# Altium PCB PCB1.PcbDoc (part 4 of 7)
Units mm, origin at the board's own origin, x right, y up, seen from the top; angles counter-clockwise.
Board outline 100 x 100 mm, 6 copper layers (Top, GND_1, Signal, PWR, GND_2, Bottom), stack 0.816 mm thick; 321 components, 260 nets, 1718 pads, 694 vias.
Unrouted connection lines stored in the file: 527.
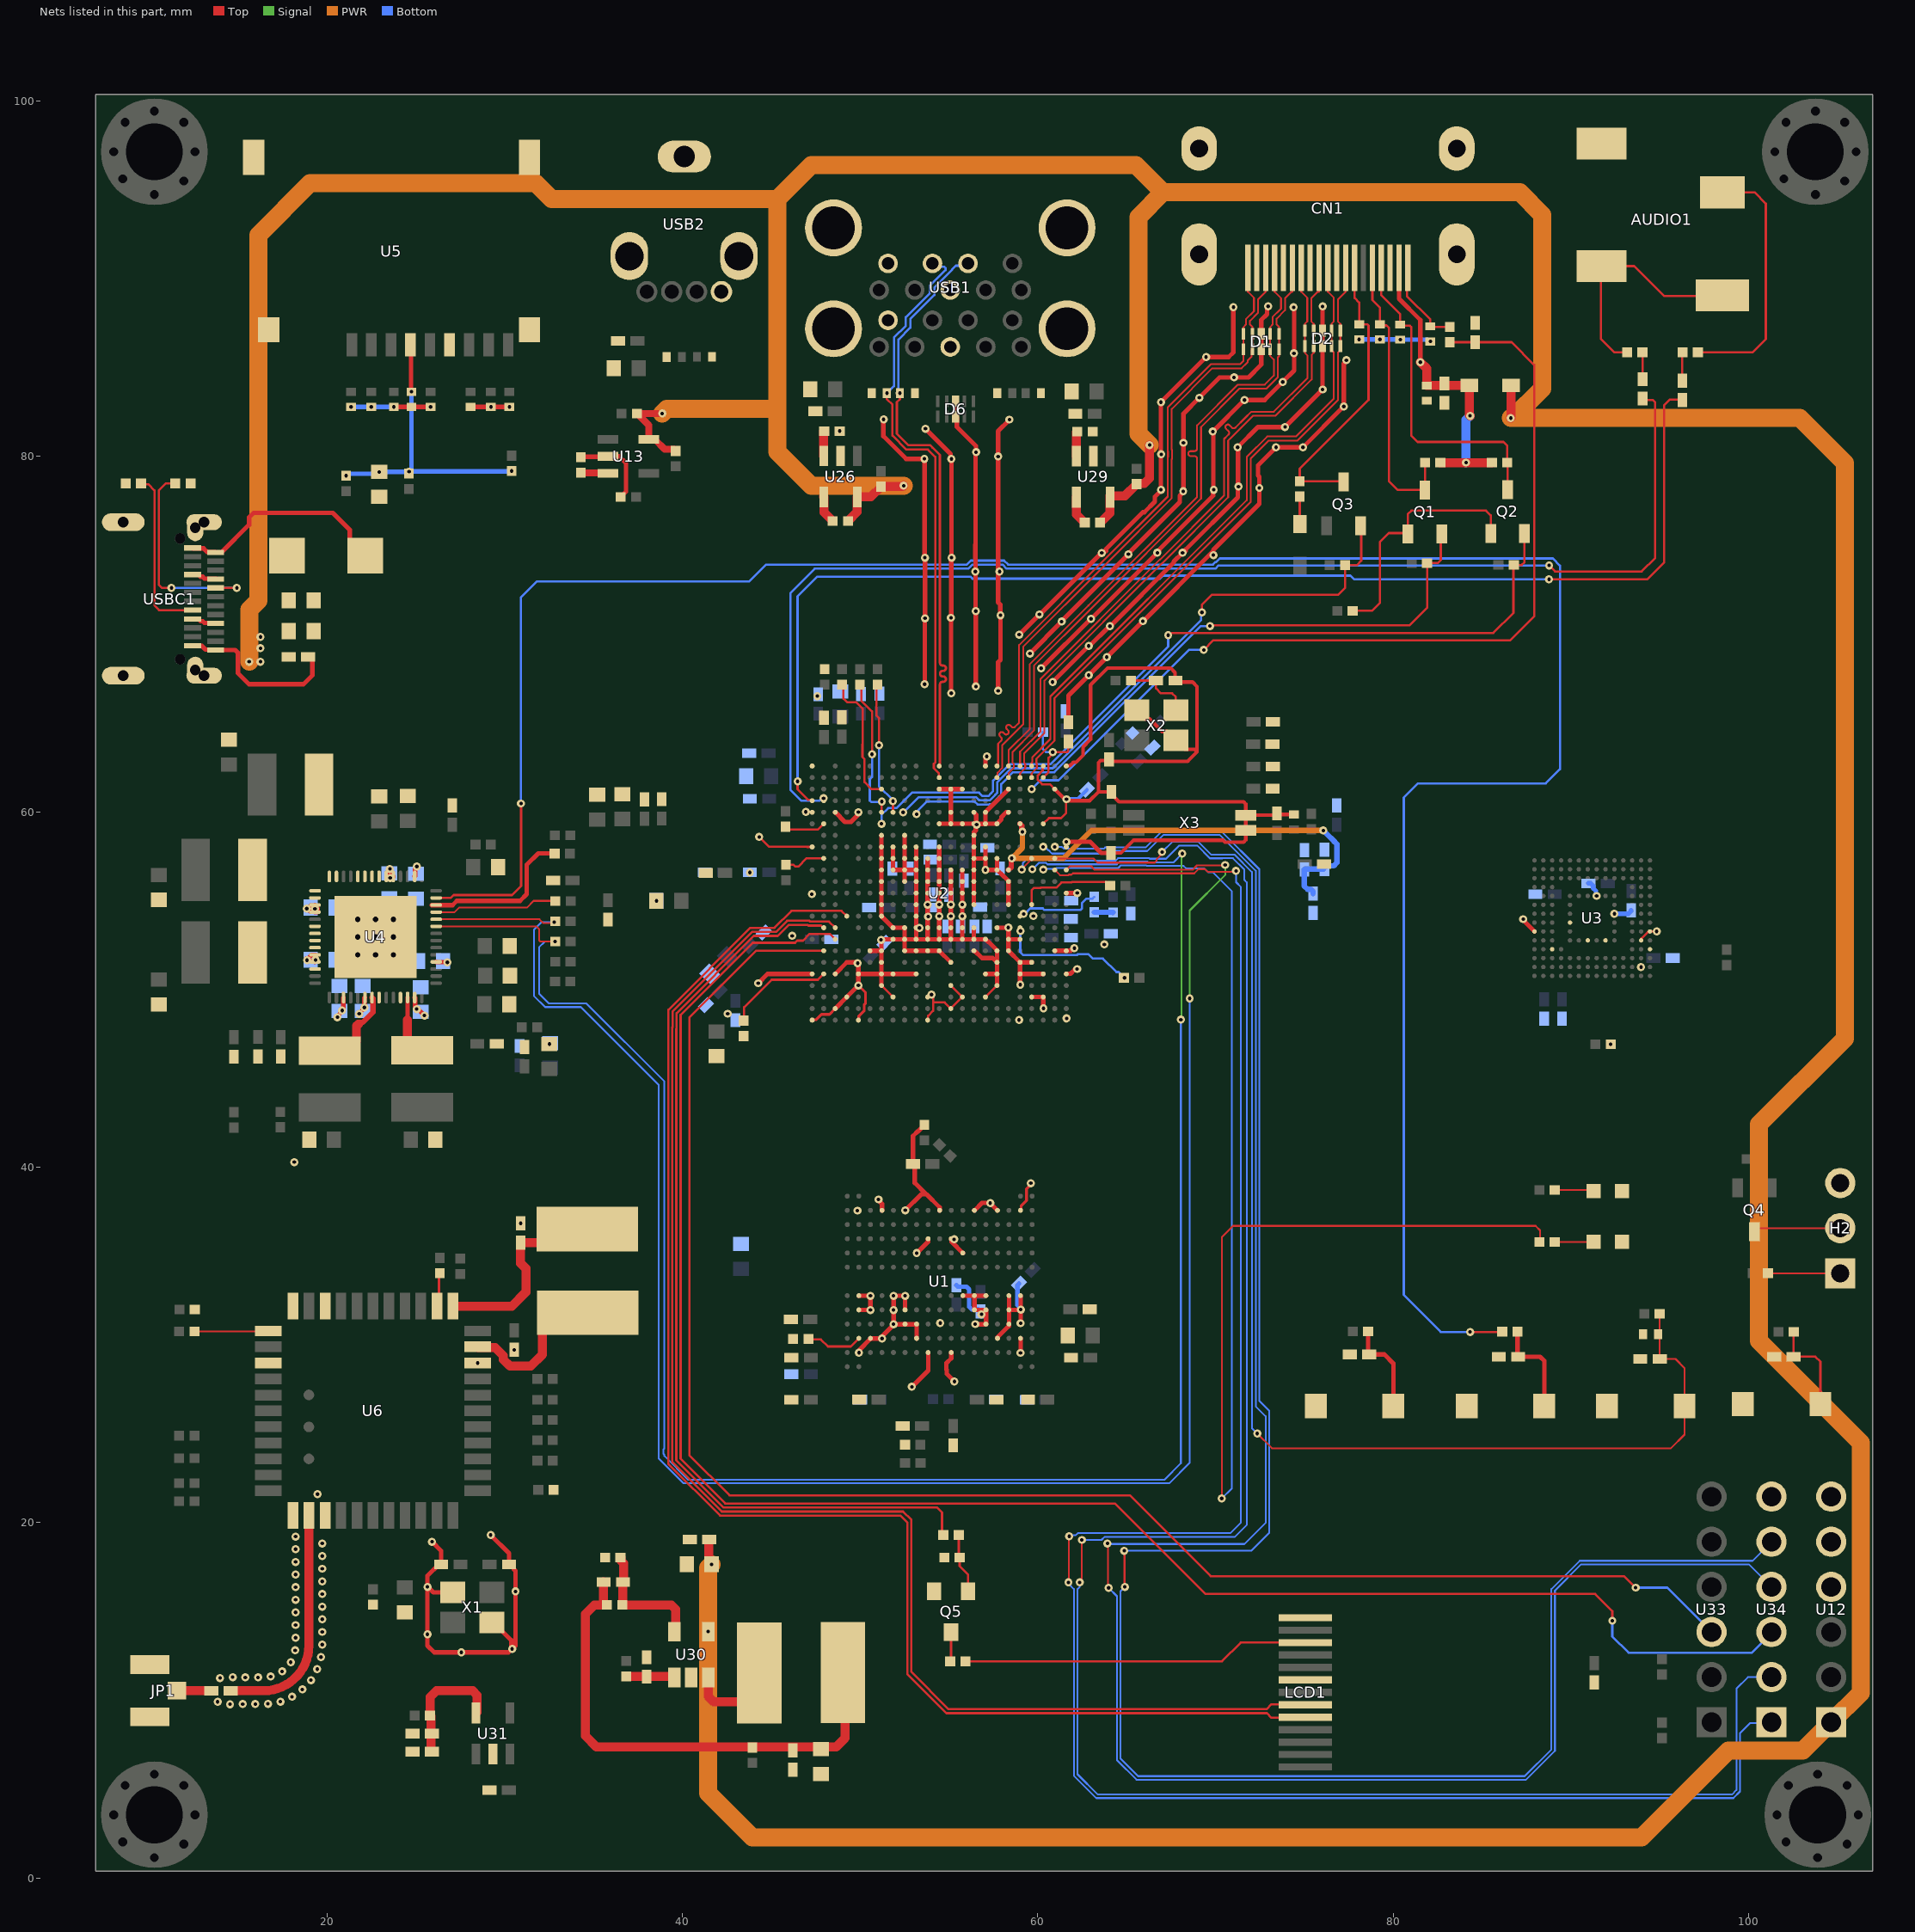
[diagram p7: the nets of this part, all layers, seen from the top]

## Via types
v1: diameter 0.457, hole 0.203, Top to Bottom, tented both sides, 685 vias
v2: diameter 0.61, hole 0.305, Top to Bottom, tented both sides, 9 vias

## Nets (pads, with @x,y where several pads share a name; then routed paths per layer and width w, separated by ;. In a path a pad name is that pad's centre, name@x,y a point inside that pad or via, vN(x,y) a via of type N, cw(c..) or ccw(c..) an arc to the next point about the centre after c; other vN are vias at no path point) (continued)
GND: AUDIO1.1 C1.1 C2.1 C3.1 C4.1 C5.1 C6.1 C7.1 C8.1 C9.1 C10.1 C11.1 C12.1 C13.1 C14.1 C15.1 C16.1 C17.1 C18.1 C19.1 C20.1 C21.1 C22.1 C23.1 C24.1 C25.1 C26.1 C27.1 C28.1 C29.1 C30.1 C31.1 C32.1 C35.1 C36.1 C38.1 C39.2 C40.1 C41.2 C42.1 C43.1 C46.1 C47.1 C48.1 C49.1 C50.1 C51.1 C52.1 C53.1 C54.1 C55.1 C56.1 C57.1 C58.1 C59.1 C60.1 C61.1 C62.1 C63.1 C64.1 C65.1 C66.1 C67.1 C68.1 C69.1 C70.1 C71.1 C72.1 C73.1 C74.1 C75.1 C76.1 C77.1 C78.1 C79.1 C80.1 C81.2 C82.2 C83.1 C84.1 C85.1 C86.1 C87.1 C89.1 C90.1 C91.1 C92.1 C93.1 C94.1 C95.1 C96.1 C97.1 C98.1 C99.1 C100.1 C101.2 C102.1 C103.1 C104.1 C105.1 C106.1 C107.1 C108.1 C109.1 C110.1 C111.1 C112.1 C113.1 C114.1 C115.1 C116.1 C117.1 C118.1 C119.1 C120.1 C121.1 C122.1 C123.1 C124.1 C125.2 C126.1 C127.1 C128.1 C129.1 C130.1 C131.1 C132.1 C133.1 C134.1 C135.1 C136.1 C137.1 C138.1 C139.2 C140.2 C141.1 C142.1 C143.1 C144.1 C145.1 C146.1 C147.1 C148.1 C149.1 C150.1 C151.1 C152.1 C153.1 C154.1 C155.1 C156.1 C157.1 CN1.2 CN1.5 CN1.8 CN1.11 CN1.17 CN1.20 CN1.21 CN1.22 CN1.23 D1.3 D1.8 D2.3 D2.8 D5.2 D6.3 D6.8 H2.3 JP1.2 JP1.3 LCD1.8 LCD1.13 PWR.1 Q5.2 R1.1 R2.1 R6.1 R7.1 R22.1 R31.1 R32.1 R38.1 R40.1 R41.2 R55.2 R57.1 R60.2 R63.2 R65.2 R72.2 R73.2 R76.1 R94.2 STATUS.1 SW1.1 SW2.1 SW3.1 SW4.1 U1.B2 U1.B5 U1.B6 U1.B12 U1.C3 U1.C5 U1.C6 U1.D3 U1.D12 U1.E4 U1.E5 U1.E6 U1.F4 U1.F5 U1.F6 U1.F12 U1.G3 U1.G4 U1.G9 U1.H2 U1.H10 U1.J4 U1.J12 U1.K2 U1.K10 U1.L6 U1.L9 U1.M4 U1.M5 U1.M6 U1.M12 U1.N4 U1.N5 U1.N6 U1.P3 U1.P12 U1.R4 U1.R5 U1.R6 U1.T2 U1.T3 U1.T4 U1.T5 U1.T6 U1.T12 U2.A1 U2.A16 U2.A21 U2.A23 U2.AA4 U2.AA8 U2.AA11 U2.AA14 U2.AA16 U2.AA20 U2.AA21 U2.AB3 U2.AB13 U2.AB21 U2.AC1 U2.AC5 U2.AC11 U2.AC19 U2.AC23 U2.C12 U2.C13 U2.C14 U2.C18 U2.C22 U2.D23 U2.E1 U2.E3 U2.E5 U2.E13 U2.E15 U2.E16 U2.E18 U2.F12 U2.F13 U2.F14 U2.F15 U2.F16 U2.F17 U2.F21 U2.G7 U2.G9 U2.G15 U2.H1 U2.H7 U2.H8 U2.H9 U2.H10 U2.H12 U2.H15 U2.H16 U2.H23 U2.J7 U2.J8 U2.J9 U2.J10 U2.J11 U2.J12 U2.J15 U2.J16 U2.J17 U2.K7 U2.K8 U2.K9 U2.K10 U2.K11 U2.K12 U2.K13 U2.K14 U2.K15 U2.K16 U2.K17 U2.L7 U2.L9 U2.L10 U2.L11 U2.L12 U2.L13 U2.L14 U2.L15 U2.L18 U2.M1 U2.M7 U2.M10 U2.M11 U2.M12 U2.M13 U2.M14 U2.M15 U2.M18 U2.M23 U2.N7 U2.N10 U2.N11 U2.N12 U2.N13 U2.N14 U2.N15 U2.N18 U2.P7 U2.P10 U2.P11 U2.P12 U2.P13 U2.P14 U2.P20 U2.R8 U2.R9 U2.R10 U2.R11 U2.R12 U2.R13 U2.R14 U2.R15 U2.R17 U2.R18 U2.T7 U2.T8 U2.T9 U2.T10 U2.T11 U2.T12 U2.T13 U2.T14 U2.T15 U2.T16 U2.T18 U2.T19 U2.U6 U2.U7 U2.U9 U2.U10 U2.U11 U2.U12 U2.U15 U2.U17 U2.U18 U2.U22 U2.U23 U2.V5 U2.V7 U2.V13 U2.V17 U2.V19 U2.V20 U2.W1 U2.W3 U2.W5 U2.W7 U2.W8 U2.W10 U2.W16 U2.W17 U2.W19 U2.W21 U2.W23 U2.Y5 U2.Y7 U2.Y13 U2.Y17 U2.Y19 U3.A6 U3.C4 U3.E7 U3.G5 U3.H10 U3.J5 U3.K8 U3.N2 U3.N5 U3.P4 U3.P6 U4.8 U4.11 U4.37 U4.38 U4.41 U4.42 U4.48 U4.49 U4.54 U4.57 U5.6 U5.10 U5.11 U5.12 U5.13 U6.1 U6.3 U6.20 U6.31 U6.33 U6.36 U7.1 U8.1 U9.1 U10.1 U11.1 U12.4 U12.5 U12.6 U13.2 U14.1 U15.1 U16.1 U17.1 U18.1 U19.1 U20.1 U21.1 U22.1 U23.1 U24.1 U25.1 U26.2 U27.1 U28.1 U29.2 U30.2 U31.2 U32.1 U34.6 U35.1 USB1.4 USB1.7 USB1.13 USB1.16 USB1.19 USB1.20 USB1.21 USB1.22 USB2.4 USB2.5 USB2.6 USB2.7 USBC1.1 USBC1.2 USBC1.3 USBC1.4 USBC1.A1 USBC1.A12 USBC1.B1 USBC1.B12 X1.2 X1.4 X2.2 X2.4 X3.2 X3.3 | length 477
  Top w0.127: v1(44.322,58.59) 44.875,58.037 47.011,58.037 47.016,58.032 U2.H1@47.303,58.032 ; v1(46.946,60.005) 46.958,59.994 47.291,59.994 U2.E1@47.303,59.982 ; U2.Y7@51.203,50.232 U2.AA8@51.853,49.582 ; U2.AC11@53.803,48.282 53.832,48.311 53.832,48.532 54.107,48.806 54.107,49.278 ; U2.AA11@53.803,49.582 53.843,49.582 53.98,49.719 v1(54.02,49.719) ; v1@53.982,49.719 53.982,49.667 54.107,49.543 54.107,49.278 ; U2.Y13@55.103,50.232 U2.AA14@55.753,49.582 55.103,48.932 54.756,49.278 54.107,49.278 ; U2.AA16@57.053,49.582 U2.Y17@57.703,50.232 ; U2.F21@60.303,59.332 60.624,59.653 61.304,59.653 61.595,59.944 61.595,60.624 U2.D23@61.603,60.632 ; U2.A21@60.303,62.582 60.274,62.553 60.274,62.332 59.999,62.058 59.999,61.806 60.247,61.559 60.676,61.559 U2.C22@60.953,61.282 ; U2.H23@61.603,58.032 61.606,58.035 61.606,58.314 v1(61.609,58.317) ; U3.N5@93.95,52.771 93.973,52.794 93.973,52.886 94.334,53.247 94.426,53.247 U3.P6@94.45,53.271 v1(94.825,53.271) v1@94.835,53.261
  Top w0.152: U2.AC1@47.303,48.282 47.327,48.306 47.53,48.306 47.831,48.607 48.278,48.607 U2.AB3@48.603,48.932 ; U2.AC5@49.903,48.282 49.927,48.306 49.927,48.509 50.237,48.818 50.237,49.165 50.308,49.235 50.308,49.827 v1(49.903,50.232) ; U1.T12@59.032,37.567 59.056,37.591 59.056,37.816 59.362,38.122 59.362,38.78 59.606,39.024 v1(59.606,39.107)
  Top w0.203: U2.C22@60.953,61.282 U2.D23@61.603,60.632 ; U2.A23@61.603,62.582 61.618,62.597 61.805,62.597 62.005,62.797 62.15,62.797 62.543,63.19 62.543,63.654 62.965,64.077 62.965,67.138 63.92,68.092 67.474,68.092 67.724,67.843 67.724,67.408 67.822,67.31 68.707,67.31 68.961,67.056 68.961,63.373 ; v1(61.612,60.714) 61.603,60.705 U2.D23@61.603,60.632 ; C140.2@64.124,57.692 64.677,57.692 65.385,58.4 70.43,58.4 70.536,58.293 71.58,58.293 71.699,58.412 X3.3@71.699,59.817 ; X2.4@65.567,65.726 66.065,65.228 66.292,65.228 66.995,64.525 67.269,64.525 X2.2@67.767,64.026 68.265,63.528 68.806,63.528 68.961,63.373 ; U32.1@74.422,59.861 73.505,59.861 C103.1@73.453,59.913 73.357,59.817 X3.3@71.699,59.817 ; U2.D23@61.603,60.632 62.918,60.632 63.41,61.124 ; 63.41,61.124 63.41,62.775 63.529,62.894 63.947,62.894 C128.1@64.008,62.955 64.117,62.846 68.434,62.846 68.961,63.373 ; 63.41,61.124 C139.2@64.135,61.124 64.135,60.999 64.566,60.568 71.58,60.568 71.699,60.449 X3.3@71.699,59.817
  Top w0.254: USBC1.B1@12.434,69.358 12.457,69.335 12.961,69.335 13.165,69.131 13.711,69.131 USBC1.A12@13.734,69.108 14.837,69.108 14.986,68.959 14.986,67.818 15.621,67.183 18.669,67.183 19.177,67.691 19.177,68.573 19.034,68.716 C54.1@18.941,68.716 ; USBC1.B12@12.434,74.858 12.457,74.835 13.049,74.835 13.253,74.631 13.711,74.631 USBC1.A1@13.734,74.608 14.059,74.608 15.621,76.17 15.621,76.581 15.875,76.835 20.32,76.835 21.277,75.878 21.277,75.293 D5.2@22.15,74.42 ; v1(23.762,82.797) U23.1@24.755,82.797 v1(25.826,82.797) ; v1(25.908,18.923) 26.425,18.406 C42.1@26.425,17.653 26.3,17.653 25.654,17.007 v1(25.654,16.383) ; X1.4@27.072,16.079 25.991,16.079 25.687,16.383 v1(25.654,16.383) ; U16.1@28.08,82.797 v1(29.223,82.797) v1(30.263,82.797) ; v1(29.21,19.304) 30.241,18.273 C41.2@30.241,17.642 30.366,17.642 30.509,17.499 30.509,17.374 30.607,17.276 v1(30.607,16.129) 30.607,13.081 v1(30.416,12.89) ; X1.2@29.272,14.379 29.372,14.379 30.378,13.373 30.378,12.929 v1(30.416,12.89) ; R55.2@34.287,79.958 34.313,79.984 35.778,79.984 U13.2@35.803,80.01 36.449,80.01 36.83,79.629 36.83,78.03 36.68,77.88 36.68,77.867 36.537,77.724 R57.1@36.524,77.724 ; v1(44.271,50.36) 44.271,50.362 44.791,50.882 U2.W1@47.303,50.882 ; U2.AB3@48.603,48.932 U2.AA4@49.253,49.582 v1(49.903,50.232) U2.V5@49.903,51.532 ; U2.W3@48.603,50.882 49.253,51.532 U2.V5@49.903,51.532 ; U2.E3@48.603,59.982 49.149,59.436 49.488,59.436 49.898,59.846 49.898,59.977 v1(49.903,59.982) ; v1(49.864,51.481) 49.903,51.52 U2.V5@49.903,51.532 ; U2.W5@49.903,50.882 U2.W7@51.203,50.882 ; v1(49.934,29.566) 49.939,29.57 49.939,29.702 U1.C3@50.579,30.343 ; U1.B5@49.934,31.966 v1(50.584,31.966) v1(50.584,32.766) U1.B6@49.934,32.766 ; U1.C3@50.584,30.366 v1(51.234,30.366) 51.239,30.371 51.239,30.494 51.877,31.132 51.877,31.161 v1(51.882,31.166) ; U2.U6@50.62,52.167 50.606,52.182 U2.U6@50.553,52.182 U2.U7@51.203,52.182 ; v1(51.035,38.188) 51.035,38.133 51.229,37.939 51.229,37.571 U1.D12@51.234,37.567 ; v1(51.18,52.797) U2.T7@51.228,52.749 ; U2.Y7@51.203,50.232 U2.W7@51.203,50.882 ; U2.T7@51.203,52.82 51.208,52.82 51.208,52.825 51.215,52.832 U2.T9@52.503,52.832 ; U2.T7@51.203,52.832 U2.U7@51.203,52.182 ; U2.G7@51.203,58.682 U2.H7@51.203,58.032 U2.J7@51.203,57.382 U2.K7@51.203,56.732 U2.L7@51.203,56.082 U2.N7@51.203,54.782 U2.P7@51.203,54.132 U2.R8@51.853,53.482 U2.R9@52.503,53.482 U2.T9@52.503,52.832 ; v1@51.308,82.042 51.308,81.153 52.591,79.87 53.617,79.87 v1(53.619,79.872) 53.633,79.857 53.633,74.32 v1(53.647,74.306) ; U2.H8@51.853,58.032 U2.J8@51.853,57.382 U2.K8@51.853,56.732 U2.K9@52.503,56.732 ; U2.L9@52.503,56.082 U2.K9@52.503,56.732 ; U2.G9@52.503,58.682 U2.H9@52.503,58.032 U2.J9@52.503,57.382 U2.K9@52.503,56.732 ; U1.F5@52.532,31.966 v1(52.532,32.766) v1(51.882,32.766) v1(51.882,31.966) v1(51.882,31.166) ; U1.F12@52.54,37.576 U1.F12@52.541,37.575 ; U1.F12@52.545,37.586 52.537,37.578 52.539,37.577 53.443,38.481 53.721,38.481 ; v1(52.911,27.643) 53.833,28.565 U1.H2@53.833,29.566 ; U2.W10@53.153,50.882 U2.W8@51.853,50.882 U2.W7@51.203,50.882 ; U2.H10@53.153,58.032 U2.J10@53.153,57.382 U2.K10@53.153,56.732 ; U1.G3@53.183,30.366 53.183,31.166 52.532,31.166 v1(51.882,31.166) ; v1(53.183,35.166) 53.828,35.812 53.828,35.962 U1.H10@53.833,35.966 ; R7.1@53.614,42.385 53.614,42.372 53.271,42.029 53.25,42.029 52.978,41.758 C32.1@52.978,40.183 53.078,40.084 53.078,39.124 53.721,38.481 ; v1(53.63,67.183) 53.644,67.197 53.644,70.884 53.663,70.904 53.652,70.914 53.652,74.264 v1@53.633,74.284 ; v1(53.674,81.568) 55.097,80.145 55.097,79.908 v1(55.136,79.87) ; U2.J11@53.803,57.382 U2.K11@53.803,56.732 U2.L11@53.803,56.082 U2.M11@53.803,55.432 v1(53.803,54.782) U2.P11@53.803,54.132 U2.R11@53.803,53.482 U2.T11@53.803,52.832 ; U2.H12@54.453,58.032 U2.J12@54.453,57.382 U2.K12@54.453,56.732 U2.L12@54.453,56.082 U2.M12@54.453,55.432 v1(54.453,54.782) v1(54.453,54.132) U2.R12@54.453,53.482 U2.T12@54.453,52.832 ; U2.F12@54.453,59.332 U2.F13@55.103,59.332 ; U2.C12@54.453,61.282 U2.C13@55.103,61.282 ; U1.J12@54.483,37.567 54.478,37.571 54.478,37.743 53.74,38.481 53.721,38.481 ; U2.V13@55.103,51.532 U2.U12@54.453,52.182 U2.U11@53.803,52.182 U2.U10@53.153,52.182 U2.U9@52.503,52.182 U2.T9@52.503,52.832 ; U2.K13@55.103,56.732 U2.L13@55.103,56.082 U2.M13@55.103,55.432 v1(55.103,54.782) v1(55.103,54.132) U2.R13@55.103,53.482 U2.T13@55.103,52.832 ; v1@55.122,79.856 55.141,79.837 v1@55.141,74.297 ; v1(55.125,66.682) 55.121,66.687 55.121,70.922 55.131,70.933 55.131,74.291 v1(55.146,74.306) ; U1.K2@55.133,29.566 55.128,29.561 55.128,29.249 54.858,28.978 54.858,28.614 54.871,28.601 54.871,28.378 v1(55.306,27.943) ; U1.K10@55.133,35.966 U1.K10@55.138,35.962 ; v1(55.294,35.941) 55.273,35.962 U1.K10@55.138,35.962 ; D6.8@55.372,83.11 D6.3@55.372,82.244 55.445,82.171 55.445,81.665 56.519,80.591 56.519,80.249 v1(56.526,80.243) ; U2.K14@55.753,56.732 U2.L14@55.753,56.082 U2.M14@55.753,55.432 v1(55.753,54.782) v1(55.753,54.132) U2.R14@55.753,53.482 U2.T14@55.753,52.832 ; U2.C14@55.753,61.282 U2.C13@55.103,61.282 ; U1.L6@55.783,32.766 U1.M6@56.434,32.766 ; U1.L9@55.783,35.166 55.138,35.812 U1.K10@55.138,35.962 ; U2.U15@56.403,52.182 56.408,52.177 56.451,52.177 56.856,51.772 57.456,51.772 57.696,51.532 U2.V17@57.703,51.532 ; U2.R15@56.403,53.482 U2.T15@56.403,52.832 ; U2.N15@56.403,54.782 U2.M15@56.403,55.432 U2.L15@56.403,56.082 U2.K15@56.403,56.732 U2.J15@56.403,57.382 ; U2.E15@56.403,59.982 56.403,59.975 56.529,59.849 v1@56.529,59.394 ; U1.M4@56.434,31.166 U1.M4@56.476,31.166 ; U1.M12@56.434,37.567 56.864,37.997 57.294,37.997 57.302,38.005 U1.P12@57.734,37.573 ; v1(56.476,31.172) U1.M4@56.476,31.166 ; v1(56.486,73.522) v1@56.496,73.522 ; v1@56.512,80.229 56.497,80.215 56.497,75.04 56.487,75.03 56.487,74.397 56.486,74.396 56.486,74.303 56.496,74.293 v1@56.496,73.522 ; v1(56.515,67.056) 56.511,67.06 56.511,71.296 56.496,71.31 v1@56.496,73.522 ; v1@56.529,59.27 56.511,59.27 56.455,59.327 56.408,59.327 U2.F15@56.403,59.332 U2.F14@55.753,59.332 U2.F13@55.103,59.332 ; v1@56.543,59.322 56.77,59.322 56.775,59.327 57.048,59.327 U2.F16@57.053,59.332 ; v1(56.553,59.283) 56.514,59.245 56.514,58.965 56.408,58.859 56.408,58.687 U2.G15@56.403,58.682 U2.H15@56.403,58.032 U2.J15@56.403,57.382 ; U1.N4@57.037,31.168 U1.N4@57.039,31.166 ; U2.W16@57.053,50.882 U2.W17@57.703,50.882 ; U2.H16@57.053,58.032 U2.J16@57.053,57.382 ; U2.A16@57.053,62.582 57.058,62.587 57.058,62.997 57.13,63.069 v1(57.13,63.124) ; U1.N4@57.083,31.166 U1.N4@57.039,31.166 ; U1.N4@57.084,31.166 57.084,31.966 56.434,31.966 U1.M6@56.434,32.766 ; U1.N6@57.084,32.766 U1.M6@56.434,32.766 ; U2.Y17@57.703,50.232 U2.W17@57.703,50.882 ; U2.R17@57.703,53.482 U2.R18@58.33,53.482 ; U2.J17@57.703,57.382 U2.K17@57.703,56.732 ; U1.P3@57.736,30.374 57.739,30.377 57.739,30.438 58.369,31.068 58.377,31.076 58.377,31.161 U1.R4@58.382,31.166 ; v1(57.763,66.816) 57.763,68.418 57.906,68.562 57.906,71.061 57.89,71.078 57.89,71.677 57.763,71.804 57.763,73.381 57.849,73.467 v1(57.849,73.522) ; v1@57.763,73.522 v1(57.763,80.003) ; v1@57.81,80.05 57.763,80.097 57.763,81.426 58.406,82.069 v1(58.406,82.08) ; v1(58.342,53.494) 58.342,53.358 58.348,53.352 58.348,52.837 U2.T18@58.353,52.832 ; U2.N18@58.353,54.782 58.353,56.082 58.348,56.087 58.348,56.117 57.933,56.533 57.909,56.533 57.71,56.732 U2.K17@57.703,56.732 ; U2.E18@58.353,59.982 58.348,59.977 58.222,59.977 57.951,59.705 57.951,59.586 57.703,59.339 U2.F17@57.703,59.332 U2.F16@57.053,59.332 ; U2.C18@58.353,61.282 U2.E16@57.053,59.982 U2.F16@57.053,59.332 ; U1.R4@58.382,31.159 U1.R4@58.382,31.166 ; U1.R6@58.382,32.766 U1.R5@58.382,31.966 ; v1(58.956,69.976) v1(60.094,71.114) ; U2.T19@59.003,52.832 U2.T18@58.353,52.832 ; v1(59.014,50.278) 59.003,50.289 U2.W19@59.003,50.882 ; v1(59.023,29.551) 59.032,29.56 59.032,29.566 U1.T3@59.032,30.366 ; U1.T4@59.033,31.166 59.033,31.954 U1.T5@59.032,31.966 ; U1.T6@59.032,32.766 U1.T5@59.032,31.983 ; v1(59.041,31.992) U1.T5@59.032,31.983 ; v1(59.562,68.915) 59.562,68.923 61.34,70.702 v1(61.34,70.71) ; U2.AA20@59.653,49.582 U2.AA21@60.303,49.582 60.303,48.964 v1(60.319,48.948) ; U2.V20@59.653,51.532 U2.V19@59.003,51.532 ; v1@60.148,71.114 60.148,71.146 63.578,74.576 v1(63.599,74.576) ; v1(60.19,68.086) 60.204,68.086 62.984,70.866 v1(62.992,70.866) ; U2.W21@60.303,50.882 U2.W19@59.003,50.882 ; v1(60.833,67.31) v1(62.865,69.342) 62.908,69.342 64.015,70.449 v1(64.057,70.449) ; U2.U22@60.953,52.182 60.958,52.187 61.853,52.187 62.001,52.335 v1(62.056,52.335) ; v1@61.34,70.724 61.34,70.729 65.095,74.483 65.095,74.536 67.995,77.436 67.995,77.8 68.182,77.987 v1(68.182,78.042) ; U2.W23@61.603,50.882 61.608,50.887 61.843,50.887 62.075,51.12 62.172,51.12 v1(62.211,51.159) ; U2.M23@61.603,55.432 61.604,55.433 v1(62.217,55.434) v1(62.217,55.434) ; v1(61.609,58.317) 62.944,58.317 63.568,57.692 C140.2@64.124,57.692 ; C131.1@61.717,65.05 61.717,66.543 v1(62.865,67.691) v1(63.881,68.707) v1(65.913,70.739) 65.928,70.739 69.865,74.676 v1@69.88,74.676 ; v1@62.996,70.882 63.016,70.882 66.719,74.584 v1(66.726,74.584) ; v1@63.672,74.547 63.8,74.676 63.837,74.676 ; 63.837,74.75 63.837,74.795 65.909,76.867 65.991,76.867 66.59,77.466 66.59,77.737 66.931,78.078 v1(66.931,78.133) ; v1@64.064,70.449 64.073,70.449 67.656,74.033 67.656,74.095 v1(68.146,74.584) ; v1@66.729,74.584 66.741,74.584 66.741,74.639 66.847,74.745 66.847,74.783 69.862,77.798 69.862,78.094 v1(69.901,78.133) 69.875,78.158 69.875,81.382 v1(69.85,81.407) v1(71.628,83.185) 72.771,83.185 v1(73.787,84.201) 74.422,84.836 74.422,88.377 v1(74.399,88.4) ; v1@66.93,80.136 66.93,78.14 v1@66.934,78.136 ; v1(66.947,80.122) 66.929,80.141 v1(66.929,83.058) v1(69.469,85.598) 70.739,85.598 71.007,85.866 v1(71.007,88.409) ; v1@68.177,74.554 68.299,74.676 v1@68.315,74.676 ; v1@68.189,80.707 68.191,80.705 v1@68.191,78.017 ; v1@68.199,80.717 68.199,82.423 v1(69.088,83.312) 70.231,84.455 71.86,84.455 72.576,85.171 D1.3@72.576,86.039 D1.8@72.576,86.905 72.576,87.689 72.898,88.011 v1@72.898,88.392 ; v1@68.315,74.733 68.315,74.759 71.257,77.701 71.257,78.268 v1(71.296,78.307) 71.271,78.331 71.271,80.494 v1(71.247,80.518) 72.39,81.661 v1(73.914,81.661) v1(76.026,83.773) D2.3@76.026,86.218 D2.8@76.026,87.084 v1(76.026,88.448) ; v1@69.779,74.59 69.88,74.488 v1(69.88,74.453) ; 69.88,74.724 69.88,74.746 72.466,77.332 v1(72.466,78.232) 72.466,78.856 72.39,78.933 72.39,79.502 v1(73.406,80.518) v1(74.918,80.518) v1(77.216,82.816) 77.216,85.219 77.365,85.368 v1(77.365,85.423) ; v1(87.318,53.966) 87.318,53.911 87.598,53.631 87.598,53.625 87.95,53.273 U3.A6@87.95,53.271 ; v1(25.654,16.383) v1(25.654,13.716) 25.654,13.081 26.035,12.7 v1(27.559,12.7) 30.226,12.7 v1(30.416,12.89) ; U2.W7@51.203,50.882 U2.V7@51.203,51.532 U2.U7@51.203,52.182 ; U2.T9@52.503,52.832 U2.T10@53.153,52.832 ; U2.K9@52.503,56.732 U2.K10@53.153,56.732 ; U2.T10@53.153,52.832 U2.R10@53.153,53.482 U2.P10@53.153,54.132 U2.N10@53.153,54.782 U2.M10@53.153,55.432 U2.L10@53.153,56.082 U2.K10@53.153,56.732 ; U2.T10@53.153,52.832 U2.T11@53.803,52.832 ; U2.T11@53.803,52.832 U2.T12@54.453,52.832 ; U2.T12@54.453,52.832 U2.T13@55.103,52.832 ; U2.T13@55.103,52.832 U2.T14@55.753,52.832 ; U2.F13@55.103,59.332 U2.E13@55.103,59.982 U2.C13@55.103,61.282 ; U2.T14@55.753,52.832 U2.T15@56.403,52.832 ; U2.T15@56.403,52.832 U2.T16@57.053,52.832 57.06,52.832 57.209,52.683 57.233,52.683 57.698,52.219 57.698,52.187 U2.U17@57.703,52.182 U2.V17@57.703,51.532 ; U2.J15@56.403,57.382 U2.J16@57.053,57.382 ; U1.M4@56.476,31.166 U1.N4@57.039,31.166 ; U2.J16@57.053,57.382 v1(57.053,56.732) U2.K17@57.703,56.732 ; U2.W17@57.703,50.882 U2.V17@57.703,51.532 ; U2.T18@58.353,52.832 U2.U18@58.353,52.182 U2.V19@59.003,51.532 ; U1.R4@58.382,31.166 U1.R5@58.382,31.966 ; U1.R5@58.382,31.966 U1.T5@59.032,31.966 ; U2.W19@59.003,50.882 U2.V19@59.003,51.532 ; U1.T5@59.032,31.966 U1.T5@59.032,31.983
  Bottom w0.203: v1(61.612,60.714) 61.627,60.729 62.253,60.729 62.758,61.234 C127.1@62.758,61.245
  Bottom w0.254: v1(21.349,82.797) v1(22.492,82.797) v1(23.762,82.797) ; C8.1@55.423,33.364 55.512,33.274 55.985,33.274 56.134,33.125 56.134,32.153 56.283,32.004 56.635,32.004 56.829,31.809 v1(56.829,31.722) ; C11.1@58.945,33.453 58.856,33.365 58.856,32.232 59.041,32.047 v1(59.041,31.992) ; v1(78.086,86.592) 78.092,86.586 80.39,86.586 v1(80.396,86.58) 81.932,86.58 82.037,86.476 v1(82.092,86.476) ; C48.1@90.981,55.98 91.106,55.98 91.249,55.837 91.249,55.712 91.411,55.55 91.411,55.31 v1(91.45,55.271) ; v1(92.45,54.271) 93.244,54.271 93.387,54.414 C49.1@93.387,54.464
  other v1: 14.543,9.777 15.254,9.788 15.965,9.788 16.676,9.802 13.845,9.915 17.377,9.925 18.032,10.201 18.612,10.613 19.095,11.135 13.984,11.257 14.694,11.301 15.405,11.29 16.116,11.29 16.826,11.335 17.476,11.625 19.448,11.752 17.961,12.145 19.664,12.43 18.204,12.813 19.732,13.138 18.23,13.524 19.732,13.849 18.23,14.235 19.732,14.56 18.23,14.946 19.732,15.271 18.23,15.657 19.732,15.983 18.23,16.369 19.732,16.694 18.23,17.08 19.732,17.405 18.23,17.791 19.732,18.116 18.23,18.502 19.732,18.827 18.23,19.213 19.469,21.603 28.477,28.981 30.536,29.728 59.032,31.221 54.508,31.235 30.897,36.849 49.845,37.561 52.544,37.58 57.321,37.987 18.156,40.288 32.517,46.936 92.239,46.931 58.946,48.286 61.622,48.378 42.545,48.641 93.95,51.271 63.747,52.539 46.18,53.026 53.34,53.467 53.833,54.109 59.753,54.138 38.543,54.991 47.285,55.371 43.795,56.594 47.593,66.515 53.657,70.898 55.117,70.927 57.9,71.068 56.506,71.3 65.095,74.502 68.199,80.772 48.852,81.437 51.321,82.09 71.046,84.455 74.409,85.81 79.252,86.592 72.962,88.456
  other v2: 21.733,51.96 22.733,51.96 23.733,51.96 21.733,52.96 22.733,52.959 23.733,52.959 21.733,53.959 22.733,53.959 23.733,53.959
HCEC: Q3.2 R16.1 U2.E9 | length 35.3
  Top w0.127: v1(69.232,71.227) 69.233,71.646 69.816,72.229 76.912,72.229 77.288,72.604 R16.1@77.288,73.889 77.953,73.889 78.203,74.139 78.203,76.055 Q3.2@78.156,76.102
  Bottom w0.127: v1(52.421,59.973) 52.437,59.973 53.298,60.833 56.515,60.833 56.666,60.682 56.684,60.682 56.705,60.66 57.185,60.66 57.188,60.663 57.309,60.663 57.6,60.954 57.6,60.96 57.71,61.07 57.71,61.416 57.71,61.665 58.503,62.458 58.753,62.458 60.843,62.458 69.192,70.808 69.192,71.186 v1(69.232,71.227)
HDMI_5V: C36.2 CN1.18 D4.1 R11.2 R14.2 U7.2 | length 17
  Top w0.254: CN1.18@80.327,90.62 80.327,88.882 81.527,87.682 v1(81.527,85.314)
  Top w0.508: v1(81.527,85.314) 81.882,84.959 U7.2@81.882,83.991 81.888,83.997 84.284,83.997 D4.1@84.29,84.004 84.29,82.334 v1(84.328,82.296) ; R11.2@82.652,79.659 v1(84.102,79.659) R14.2@85.552,79.659
  Bottom w0.508: v1(84.102,79.659) 84.102,82.07 v1(84.328,82.296)
HDMI_CEC: CN1.13 Q3.3 R17.1 U11.2 | length 16.7
  Top w0.127: Q3.3@77.206,78.572 77.166,78.612 R17.1@74.743,78.612 74.743,79.315 78.613,83.185 78.613,87.367 78.539,87.442 U11.2@78.086,87.442 78.086,88.665 77.827,88.924 CN1.13@77.827,90.62
HDMI_SCL: CN1.15 Q1.3 R11.1 U10.2 | length 16.3
  Top w0.127: CN1.15@78.827,90.62 78.827,88.813 79.252,88.388 U10.2@79.252,87.442 79.318,87.376 79.629,87.376 79.756,87.249 79.756,78.613 80.252,78.117 Q1.3@81.783,78.117 81.786,78.121 R11.1@81.786,79.659
HDMI_SDA: CN1.16 Q2.3 R14.1 U9.2 | length 18.5
  Top w0.127: CN1.16@79.327,90.62 79.327,89.075 80.396,88.006 U9.2@80.396,87.43 80.465,87.361 80.936,87.361 81.026,87.272 81.026,81.164 81.367,80.823 86.2,80.823 86.418,80.604 R14.1@86.418,79.659 ; Q2.3@86.44,78.142 R14.1@86.44,79.636
HHPD: C35.2 R15.1 U2.C20 | length 51.7
  Top w0.127: v1(69.34,69.118) 69.884,69.663 86.59,69.663 87.937,71.01 87.937,85.164 86.666,86.435 C35.2@84.606,86.435 R15.1@83.185,86.435
  Bottom w0.127: v1(59.653,61.282) 60.148,61.777 61.167,61.777 68.507,69.118 v1(69.34,69.118)
HOST3_N: U2.A12 U24.2 USB1.2 | length 32.9
  Top w0.127: v1(52.236,83.566) 52.236,83.227 52.07,83.061 52.07,81.28 52.705,80.645 53.926,80.645 54.075,80.496 54.486,80.085 54.492,80.08 54.492,68.961 54.492,68.39 ccw(c54.644,68.39) 54.644,68.237 54.678,68.237 cw(c54.678,68.085) 54.678,67.932 54.644,67.932 ccw(c54.644,67.78) 54.644,67.628 54.678,67.628 cw(c54.678,67.475) 54.678,67.323 54.644,67.323 ccw(c54.644,67.17) 54.492,67.17 54.492,66.802 54.492,62.691 54.482,62.681 54.482,62.611 U2.A12@54.453,62.582
  Bottom w0.127: v1(52.236,83.566) 52.173,83.629 52.173,83.792 52.159,83.805 52.159,86.589 52.826,87.255 52.826,87.738 54.178,89.089 54.178,89.512 55.17,90.505 55.17,90.529 55.383,90.742 55.946,90.742 USB1.2@56.073,90.869
HOST3_P: U2.B12 U25.2 USB1.3 | length 33.1
  Top w0.127: U25.2@51.669,83.404 v1(51.507,83.566) 51.507,83.227 51.816,82.919 51.816,81.175 52.6,80.391 53.821,80.391 54.232,79.98 54.238,79.974 54.238,62.796 54.15,62.708 54.15,62.456 54.424,62.182 54.424,61.961 U2.B12@54.453,61.932
  Bottom w0.127: v1(51.507,83.566) 51.905,83.964 51.905,86.694 52.572,87.361 52.572,87.843 53.924,89.195 53.924,89.618 54.808,90.502 54.808,90.607 54.732,90.683 54.26,90.683 USB1.3@54.073,90.869
HSCL: Q1.2 R10.1 U2.E10 | length 39
  Top w0.127: v1(69.688,70.462) 69.723,70.497 80.911,70.497 81.915,71.501 81.915,73.995 R10.1@81.905,74.006 82.515,74.006 82.677,74.168 82.677,75.591 Q1.2@82.733,75.647
  Bottom w0.127: v1(53.18,59.871) 53.18,59.96 53.28,60.061 53.28,60.109 53.75,60.579 56.448,60.579 56.609,60.418 56.911,60.418 56.917,60.411 57.257,60.411 57.282,60.436 57.403,60.436 57.827,60.86 57.827,60.866 57.937,60.976 57.937,61.322 57.937,61.571 58.597,62.231 58.847,62.231 60.937,62.231 69.167,70.462 v1(69.688,70.462)
HSDA: Q2.2 R13.1 U2.F7 | length 46.7
  Top w0.127: v1(67.337,69.95) 67.426,69.95 67.546,70.07 85.637,70.07 86.767,71.2 86.767,73.878 R13.1@86.785,73.896 87.231,73.896 87.39,74.055 Q2.2@87.39,75.672
  Bottom w0.127: v1(51.203,59.332) 51.203,59.839 51.575,60.211 52.047,60.211 52.922,61.087 56.693,61.087 56.891,60.89 57.215,60.89 57.373,61.048 57.373,61.054 57.483,61.164 57.483,61.51 57.483,61.759 58.409,62.685 58.658,62.685 60.718,62.685 67.337,69.304 v1(67.337,69.95)
HTX0_N: CN1.9 D2.2 D2.9 U2.B19 | length 36.6
  Top w0.102: U2.B19@59.003,61.932 59.003,62.171 59.294,62.462 59.294,62.702 59.232,62.765 59.232,63.295 60.376,64.44 60.376,67.389 66.963,73.977 66.978,73.977 70.714,77.712 70.714,80.899 70.852,81.037 72.111,82.296 73.374,82.296 75.413,84.335 75.413,85.722 75.526,85.835 D2.2@75.526,86.218 D2.9@75.526,87.084 75.526,87.467 75.39,87.603 75.39,88.9 75.759,89.269 75.827,89.269 CN1.9@75.827,90.62
HTX0_P: CN1.7 D2.1 D2.10 U2.A19 | length 36.4
  Top w0.102: U2.A19@59.003,62.582 59.003,63.39 60.147,64.535 60.147,67.484 66.868,74.205 66.883,74.205 70.485,77.807 70.485,80.994 70.69,81.199 70.726,81.235 ccw(c70.627,81.334) 70.726,81.432 70.596,81.563 cw(c70.695,81.661) 70.596,81.76 cw(c70.695,81.661) 70.794,81.76 70.924,81.63 ccw(c71.022,81.729) 71.121,81.63 71.644,82.153 72.016,82.525 73.279,82.525 75.184,84.43 75.184,85.677 75.026,85.835 D2.1@75.026,86.218 D2.10@75.026,87.084 75.026,87.467 75.161,87.603 75.161,88.935 74.827,89.269 CN1.7@74.827,90.62
HTX1_N: CN1.6 D1.5 D1.6 U2.B18 | length 36.4
  Top w0.102: U2.B18@58.353,61.932 58.353,62.171 58.644,62.462 58.644,62.65 58.644,62.702 58.582,62.765 58.582,63.38 59.782,64.58 59.782,68.224 63.078,71.52 69.19,77.631 69.19,79.832 69.19,81.661 71.349,83.82 72.866,83.82 73.508,84.462 73.508,85.587 73.576,85.656 D1.5@73.576,86.039 D1.6@73.576,86.905 73.576,87.288 73.441,87.424 73.441,87.757 73.914,88.23 73.914,88.9 74.283,89.269 74.327,89.269 CN1.6@74.327,90.62
HTX1_P: CN1.4 D1.4 D1.7 U2.A18 | length 36.3
  Top w0.102: U2.A18@58.353,62.582 58.353,63.474 59.554,64.675 59.554,68.319 62.849,71.614 68.961,77.726 68.961,79.832 68.961,79.883 ccw(c68.821,79.883) 68.821,80.023 68.608,80.023 cw(c68.608,80.162) 68.608,80.302 68.821,80.302 ccw(c68.821,80.442) 68.961,80.442 68.961,81.026 68.961,81.756 71.254,84.049 72.771,84.049 73.279,84.557 73.279,85.454 73.077,85.656 D1.4@73.077,86.039 D1.7@73.077,86.905 73.077,87.288 73.212,87.424 73.212,87.852 73.685,88.325 73.685,88.91 73.327,89.269 CN1.4@73.327,90.62
HTX2_N: CN1.3 D1.2 D1.9 U2.B17 | length 36
  Top w0.102: U2.B17@57.703,61.932 57.737,61.966 57.737,62.205 57.994,62.461 57.994,62.568 ; 57.995,62.568 57.995,63.744 59.08,64.829 59.16,64.909 59.176,64.925 59.176,69.293 63.851,73.968 67.539,77.656 67.539,79.854 67.555,79.871 67.555,80.374 67.539,80.391 67.539,82.677 69.825,84.963 71.469,84.963 71.805,85.299 71.805,85.394 72.026,85.615 72.026,85.988 D1.2@72.077,86.039 D1.9@72.077,86.905 72.077,87.288 71.941,87.424 71.941,87.63 72.39,88.079 72.39,88.832 72.827,89.269 CN1.3@72.827,90.62
HTX2_P: CN1.1 D1.1 D1.10 U2.A17 | length 36.1
  Top w0.102: U2.A17@57.703,62.582 57.703,62.63 57.766,62.693 57.766,63.744 57.766,63.839 57.894,63.966 57.93,64.002 ccw(c57.831,64.101) 57.93,64.2 57.873,64.256 cw(c57.972,64.355) 57.873,64.454 cw(c57.972,64.355) 58.071,64.454 58.127,64.397 ccw(c58.226,64.496) 58.325,64.397 ccw(c58.226,64.496) 58.325,64.595 58.258,64.661 cw(c58.357,64.76) 58.258,64.859 cw(c58.357,64.76) 58.456,64.859 58.522,64.792 ccw(c58.621,64.891) 58.72,64.792 58.918,64.991 58.931,65.004 58.947,65.02 58.947,69.388 63.757,74.197 67.31,77.75 67.31,79.949 67.326,79.965 67.326,80.28 67.31,80.296 67.31,82.772 69.73,85.192 71.374,85.192 71.576,85.394 D1.1@71.576,86.039 D1.10@71.576,86.905 71.576,87.288 71.712,87.424 71.712,87.725 72.161,88.174 72.161,88.935 71.827,89.269 CN1.1@71.827,90.62
HTXC_N: CN1.12 D2.5 D2.6 U2.B20 | length 37.1
  Top w0.102: U2.B20@59.653,61.932 59.653,62.171 59.944,62.462 59.944,62.702 59.919,62.728 59.919,62.987 60.938,64.006 60.938,66.403 71.85,77.315 71.984,77.449 71.984,79.883 73,80.899 74.618,80.899 76.89,83.171 76.89,85.852 76.949,85.911 76.951,85.911 77.026,85.986 D2.5@77.026,86.218 D2.6@77.026,87.084 77.026,87.467 76.89,87.603 76.89,88.832 77.327,89.269 CN1.12@77.327,90.62
HTXC_P: CN1.10 D2.4 D2.7 U2.A20 | length 36.3
  Top w0.102: U2.A20@59.653,62.582 59.653,62.773 59.69,62.81 59.69,63.081 60.709,64.101 60.709,66.498 71.755,77.543 71.755,79.978 72.905,81.128 74.524,81.128 76.661,83.265 76.661,85.852 76.602,85.911 76.6,85.911 76.526,85.986 D2.4@76.526,86.218 D2.7@76.526,87.084 76.526,87.467 76.661,87.603 76.661,88.934 76.327,89.269 CN1.10@76.327,90.62
KEYADC: C131.2 R74.1 U2.B21 | length 4.7
  Top w0.127: U2.B21@60.303,61.932 60.606,62.235 60.606,63.039 60.84,63.272 v1(60.84,63.362) 61.643,63.362 61.717,63.436 C131.2@61.717,63.96
  Bottom w0.127: R74.1@60.292,64.495 60.292,63.533 60.452,63.373 60.829,63.373 v1(60.84,63.362)
LCD_BL: LCD1.11 R92.2 | length 19.6
  Top w0.127: R92.2@55.932,12.192 70.358,12.192 71.414,13.248 LCD1.11@75.057,13.248
LINEOUTL: C34.2 U2.D2 | length 72.8
  Top w0.127: v1(88.773,73.872) 89.112,73.533 93.982,73.533 94.742,74.293 94.742,83.058 94.615,83.185 94.116,83.185 C34.2@94.035,83.265
  Bottom w0.127: v1(47.943,60.768) 47.853,60.768 47.717,60.632 47.46,60.632 46.683,60.632 46.075,61.24 46.075,72.316 47.446,73.687 56.097,73.687 56.324,73.914 58.011,73.914 58.238,73.687 69.99,73.687 70.175,73.872 v1(88.773,73.872)
LINEOUTR: C33.2 U2.D1 | length 71.8
  Top w0.127: v1(46.482,61.722) 46.482,61.269 47.064,60.688 47.206,60.688 47.262,60.632 U2.D1@47.303,60.632 ; v1(88.77,73.087) 94.297,73.087 95.248,74.038 95.248,82.894 95.556,83.203 96.248,83.203 C33.2@96.266,83.185
  Bottom w0.127: v1(46.482,61.722) 46.482,72.136 47.591,73.245 56.209,73.245 56.324,73.13 66.876,73.13 67.043,73.297 77.596,73.297 77.806,73.087 v1(88.77,73.087)
NetAUDIO1_2: AUDIO1.2 AUDIO1.4 R9.1 | length 13.4
  Top w0.127: R9.1@93.161,85.865 92.443,85.865 91.694,86.614 91.694,90.691 AUDIO1.2@91.723,90.72 93.557,90.72 95.25,89.027 98.48,89.027 AUDIO1.4@98.523,89.07
NetAUDIO1_3: AUDIO1.3 R8.1 | length 14.5
  Top w0.127: R8.1@97.144,85.865 100.216,85.865 100.965,86.614 100.965,94.234 100.33,94.869 AUDIO1.3@98.524,94.869
NetC33_1: C33.1 R8.2 | length 1.6
  Top w0.127: C33.1@96.266,84.275 96.266,85.852 R8.2@96.279,85.865
NetC34_1: C34.1 R9.2 | length 1.5
  Top w0.127: R9.2@94.027,85.865 94.035,85.856 C34.1@94.035,84.355
NetC37_1: C37.1 JP1.1 | length 1.9
  Top w0.508: JP1.1@11.547,10.539 C37.1@13.488,10.539
NetC37_2: C37.2 U6.2 | length 13.2
  Top w0.508: C37.2@14.578,10.539 16.441,10.539 ccw(c16.441,13.079) 18.981,13.079 U6.2@18.981,20.399
NetC39_1: C39.1 L1.2 U6.23 | length 11.4
  Top w0.508: U6.23@27.083,32.178 30.4,32.178 31.19,32.968 31.19,34.309 30.897,34.602 C39.1@30.897,35.759 33.891,35.759 L1.2@34.649,36.517
NetC83_2: C83.2 R52.2 R53.1 R56.2 U5.4 U23.2 | length 16.5
  Top w0.254: U5.4@24.695,86.284 24.725,86.254 24.725,83.676 v1(24.755,83.647)
  Bottom w0.254: v1(21.082,78.919) 21.137,78.919 21.251,79.033 22.693,79.033 22.755,79.095 22.899,79.095 v1(22.938,79.134) ; v1@22.951,79.134 22.97,79.153 22.98,79.144 24.606,79.144 v1(24.616,79.153) 24.756,79.293 v1@24.756,83.645 ; v1@24.755,79.169 30.371,79.169 v1(30.387,79.185)
NetC88_1: C88.1 R65.1 R67.1 U30.5 | length 7.1
  Top w0.305: R67.1@36.613,15.367 R67.1@36.634,15.388 ; C88.1@36.634,16.643 C88.1@36.655,16.664 ; U30.5@39.549,13.867 U30.5@39.624,13.942
  Top w0.508: R65.1@36.516,18.027 36.529,18.027 36.545,18.011 36.545,17.855 36.686,17.714 C88.1@36.686,16.68 ; R67.1@36.613,15.367 39.37,15.367 39.624,15.113 U30.5@39.624,13.942 ; R67.1@36.634,15.388 C88.1@36.634,16.643
NetC88_2: C88.2 C92.2 C93.2 L7.1 R67.2 R68.1 | length 28.5
  Top w0.305: R67.2@35.565,15.537 35.735,15.367 R67.2@35.748,15.367 ; L7.1@49.025,11.566 L7.1@49.149,11.442
  Top w0.508: R67.2@35.565,15.537 C88.2@35.565,16.664 ; R67.2@35.735,15.367 35.052,15.367 34.544,14.859 34.544,8.001 35.179,7.366 43.942,7.366 46.218,7.366 47.796,7.366 48.641,7.366 49.149,7.874 L7.1@49.149,11.442
NetC89_2: C89.2 R66.2 U30.1 | length 2.7
  Top w0.305: U30.1@39.48,11.347 U30.1@39.547,11.279
  Top w0.508: R66.2@36.837,11.347 U30.1@39.48,11.347
NetC94_2: C94.2 C95.2 R69.1 U31.5 | length 7
  Top w0.305: R69.1@25.796,9.144 R69.1@25.852,9.088 ; C94.2@25.852,7.168 C94.2@25.908,7.112 ; U31.5@28.387,9.282 U31.5@28.448,9.343
  Top w0.508: R69.1@25.796,9.144 25.796,10.175 26.162,10.541 28.194,10.541 28.448,10.287 U31.5@28.448,9.343 ; C94.2@25.852,7.168 R69.1@25.852,9.088
NetC125_1: C125.1 R80.1 X2.3 | length 3.9
  Top w0.127: R80.1@65.243,67.395 66.647,67.395 C125.1@66.655,67.387 66.655,66.949 66.929,66.675 67.564,66.675 67.767,66.472 X2.3@67.767,65.726
NetC154_2: C154.2 R86.1 SW1.2 | length 5.5
  Top w0.254: R86.1@86.999,30.745 86.999,29.37 C154.2@87.032,29.337 88.265,29.337 88.501,29.101 SW1.2@88.501,26.565
NetC155_2: C155.2 R87.1 SW2.2 | length 5.3
  Top w0.254: R87.1@78.589,30.756 78.589,29.525 C155.2@78.65,29.464 79.502,29.464 80.012,28.954 SW2.2@80.012,26.565
NetC156_2: C156.2 R88.1 SW3.2 | length 5.4
  Top w0.127: R88.1@102.541,30.734 102.526,30.719 C156.2@102.526,29.337 103.759,29.337 104.039,29.057 SW3.2@104.039,26.67
NetCN1_19: CN1.19 R15.2 U8.2 | length 5
  Top w0.127: CN1.19@80.827,90.62 80.772,90.565 80.772,89.035 82.092,87.715 U8.2@82.092,87.326 82.117,87.301 R15.2@83.185,87.301
NetD3_1: D3.1 R17.2 | length 1.5
  Top w0.127: D3.1@74.743,76.203 R17.2@74.743,77.746
NetH2_1: H2.1 R84.2 | length 4.1
  Top w0.102: R84.2@101.092,34.036 H2.1@105.156,34.036
NetH2_2: H2.2 Q4.3 | length 4.9
  Top w0.102: Q4.3@100.326,36.371 100.53,36.576 H2.2@105.156,36.576
NetL1_1: L1.1 U6.21 | length 8.8
  Top w0.508: U6.21@28.477,29.895 28.523,29.849 29.46,29.849 29.912,29.397 29.912,29.186 30.295,28.804 31.471,28.804 32.131,29.464 32.131,30.821 33.127,31.817 L1.1@34.674,31.817
NetL2_1: L2.1 U4.43 U4.44
NetL3_1: L3.1 U4.35 U4.36
NetL4_1: L4.1 U4.50 U4.51
NetL5_1: L5.1 U4.7 | length 4.7
  Top w0.305: 21.766,48.055 21.865,48.155 22.013,48.155 22.587,48.728 22.587,49.193 22.581,49.199 22.581,49.504 U4.7@22.533,49.551
  Top w0.508: L5.1@20.16,46.561 21.11,46.561 21.656,47.107 21.656,47.945 21.766,48.055
NetL6_1: L6.1 U4.12 | length 3.1
  Top w0.254: 24.533,48.282 U4.12@24.533,49.551
  Top w0.508: 24.533,48.282 24.533,46.907 L6.1@24.879,46.561
NetL7_2: L7.2 U30.3 | length 5
  Top w0.305: L7.2@43.227,9.906 44.325,11.004 L7.2@44.325,11.54
  Top w0.508: U30.3@41.449,11.279 41.449,10.24 41.783,9.906 L7.2@43.227,9.906
NetLED1_2: PWR.2 R90.2 | length 2.2
  Top w0.102: R90.2@89.093,35.799 PWR.2@91.27,35.799
NetLED2_2: R91.2 STATUS.2 | length 2.2
  Top w0.102: R91.2@89.093,38.725 91.202,38.725 STATUS.2@91.27,38.657
NetQ1_1: Q1.1 Q2.1 R12.2 | length 13.9
  Top w0.127: R12.2@77.716,71.317 78.81,71.317 79.248,71.755 79.248,75.184 79.756,75.692 80.788,75.692 Q1.1@80.833,75.647 80.833,76.769 81.026,76.962 85.217,76.962 85.49,76.689 Q2.1@85.49,75.672
NetQ5_1: Q5.1 R93.1 R94.1 | length 3.4
  Top w0.127: R93.1@55.551,19.304 55.551,18.086 R94.1@55.603,18.034 55.603,17.549 56.068,17.084 Q5.1@56.068,16.136
NetQ5_3: Q5.3 R92.1 | length 1.7
  Top w0.127: R92.1@55.066,12.192 55.118,12.244 Q5.3@55.118,13.836
NetR1_2: R1.2 U1.B3 | length 3.2
  Top w0.127: R1.2@47.098,30.335 47.125,30.308 47.797,30.308 48.193,29.912 49.48,29.912 U1.B3@49.934,30.366
NetR2_2: R2.2 U2.W2 | length 6
  Top w0.127: R2.2@43.444,48.252 43.475,48.283 43.475,49.01 45.017,50.552 47.623,50.552 U2.W2@47.953,50.882
NetR23_1: R23.1 U6.34 | length 4.2
  Top w0.102: R23.1@12.539,30.768 16.682,30.768 U6.34@16.698,30.784
NetR29_1: R29.1 U6.24 | length 1.9
  Top w0.127: U6.24@26.194,32.178 26.3,32.283 26.3,33.977 R29.1@26.356,34.033
NetR33_1: R33.1 U2.F2 | length 2.5
  Top w0.127: R33.1@45.702,59.195 45.885,59.011 47.633,59.011 U2.F2@47.953,59.332
NetR34_2: R34.2 U2.N20 | length 5.5
  Top w0.127: U2.N20@59.653,54.782 59.653,55.589 59.791,55.727 60.169,55.727 60.177,55.735 61.036,55.735 61.326,56.025 61.896,56.025 61.924,56.053 63.864,56.053 R34.2@64.067,55.85
NetR35_1: R35.1 U2.J2 | length 2.4
  Top w0.127: R35.1@45.828,57.027 46.25,57.027 46.349,56.928 46.522,56.928 46.976,57.382 U2.J2@47.953,57.382
NetR36_2: R36.2 U2.R19 | length 7.7
  Bottom w0.127: v1(59.026,53.3) 59.015,53.289 59.015,52.11 59.182,51.943 62.201,51.943 62.255,51.998 62.835,51.998 63.091,51.742 63.67,51.742 64.426,50.987 64.554,50.987 v1(64.883,50.658)
NetR40_2: R40.2 USBC1.A5 | length 12.1
  Top w0.127: v1(11.249,72.608) 10.704,72.608 10.541,72.771 10.541,78.105 10.922,78.486 R40.2@11.457,78.486 ; USBC1.A5@13.734,72.608 v1(14.927,72.608) v1@14.941,72.594
  Bottom w0.127: v1(11.249,72.608) v1(14.927,72.608)
NetR41_1: R41.1 USBC1.B5 | length 9.6
  Top w0.127: R41.1@9.54,78.484 9.585,78.439 9.937,78.439 10.288,78.088 10.288,71.619 10.549,71.358 USBC1.B5@12.434,71.358
NetR42_2: R42.2 U4.26 | length 9.1
  Top w0.254: U4.26@25.908,54.752 27.066,54.752 27.305,54.991 30.861,54.991 31.242,55.372 31.242,57.023 31.891,57.672 R42.2@32.796,57.672
NetR46_2: R46.2 U4.25 | length 7
  Top w0.102: U4.25@26.141,54.359 27.181,54.359 27.432,54.61 31.242,54.61 31.623,54.991 32.843,54.991 R46.2@32.852,54.982
NetR55_1: R55.1 U13.3 | length 1.5
  Top w0.381: R55.1@34.287,79.093 34.303,79.076 35.787,79.076 U13.3@35.803,79.06
NetR59_1: R59.1 U26.4 | length 1.6
  Top w0.508: U26.4@47.95,77.729 47.959,77.72 47.959,76.861 48.444,76.376 R59.1@48.456,76.376
NetR60_1: R60.1 U26.3 | length 1.4
  Top w0.508: U26.3@47.95,80.036 47.95,81.411 47.969,81.431 R60.1@47.982,81.431
NetR62_1: R62.1 U29.4 | length 1.6
  Top w0.508: U29.4@62.169,77.713 62.178,77.704 62.178,76.746 62.611,76.312 62.611,76.3 62.627,76.284 R62.1@62.64,76.284
NetR63_1: R63.1 U29.3 | length 1.4
  Top w0.508: U29.3@62.169,80.021 62.169,81.356 62.214,81.401 R63.1@62.226,81.401
NetR70_2: R70.2 R71.1 | length 1.1
  Bottom w0.305: R71.1@63.18,54.353 63.185,54.348 64.228,54.348 R70.2@64.234,54.343
NetR71_2: R71.2 U2.P19 | length 4.9
  Top w0.127: U2.P19@59.003,54.132 59.038,54.132 59.168,54.262 v1(59.203,54.262)
  Bottom w0.127: v1(59.203,54.262) 59.275,54.262 59.58,54.567 60.28,54.567 60.364,54.483 62.41,54.483 62.484,54.557 62.484,54.864 62.738,55.118 63.079,55.118 R71.2@63.18,55.219
NetR77_1: R77.1 U2.E8 | length 7.6
  Top w0.127: R77.1@51.061,67.165 50.919,67.023 50.919,65.43 51.065,65.284 v1(51.065,63.752) ; v1(51.846,60.603) 51.85,60.6 51.85,59.985 U2.E8@51.853,59.982
  Bottom w0.127: v1(51.065,63.752) 51.065,61.45 51.846,60.669 v1(51.846,60.603)
NetR78_1: R78.1 U2.C7 | length 7.4
  Top w0.127: R78.1@49.066,67.134 49.066,66.377 49.276,66.167 49.784,66.167 50.154,65.797 50.154,63.816 50.133,63.795 50.133,63.084 50.25,62.967 50.25,61.806 50.251,61.804 50.251,61.684 50.653,61.282 U2.C7@51.203,61.282
NetR79_2: R79.2 U2.E7 | length 8.2
  Top w0.127: R79.2@50.072,67.165 50.072,66.26 50.673,65.659 v1(50.673,63.246) ; U2.E7@51.203,59.982 51.213,59.991 51.213,60.577 v1(51.222,60.586)
  Bottom w0.127: v1(50.673,63.246) 50.673,61.961 50.546,61.834 50.546,60.639 50.63,60.555 51.191,60.555 v1(51.222,60.586)
PD15: LCD1.6 U2.R3 | length 83.3
  Top w0.127: U2.R3@48.603,53.482 48.257,53.828 47.177,53.828 47.132,53.873 45.902,53.873 45.274,53.246 43.922,53.246 39.442,48.766 39.442,47.888 39.433,47.878 39.433,23.407 42.216,20.624 52.414,20.624 52.881,20.157 52.881,11.608 54.984,9.505 72.878,9.505 73.152,9.779 75.026,9.779 LCD1.6@75.057,9.748
PD16: R93.2 U2.R2 | length 53.1
  Top w0.127: U2.R2@47.953,53.482 47.912,53.482 47.792,53.601 47.083,53.601 47.038,53.646 45.996,53.646 45.368,53.019 44.016,53.019 39.669,48.672 39.669,47.794 39.66,47.784 39.66,23.501 42.31,20.851 54.333,20.851 54.61,20.574 54.61,19.379 R93.2@54.685,19.304
PD18: LCD1.5 U2.P4 | length 84.8
  Top w0.127: U2.P4@49.253,54.132 48.949,54.435 46.143,54.435 45.18,53.473 43.828,53.473 39.215,48.86 39.215,48.526 39.206,48.516 39.206,23.313 42.122,20.397 52.272,20.397 52.654,20.015 52.654,11.481 54.857,9.278 72.891,9.278 73.152,9.017 75.026,9.017 LCD1.5@75.057,9.048
PD21: U2.T3 U34.3 | length 103
  Top w0.127: U2.T3@48.603,52.832 48.3,53.136 47.167,53.136 46.786,52.755 46.464,52.755 46.343,52.634 43.953,52.634 39.896,48.578 39.896,23.599 42.418,21.078 64.343,21.078 69.434,15.987 91.36,15.987 92.329,15.018 v1(92.329,14.478)
  Bottom w0.127: v1(92.329,14.478) 92.329,13.589 93.239,12.679 100.182,12.679 101.29,13.787 U34.3@101.29,13.843
PL8: U2.H22 U34.5 | length 118.6
  Top w0.102: v1(64.862,18.417) 64.88,18.399 64.88,16.4 v1(64.897,16.383)
  Bottom w0.102: v1(60.953,58.032) 61.357,58.032 61.452,57.937 63.731,57.937 63.794,58 66.074,58 66.99,58.917 70.32,58.917 72.468,56.769 72.468,26.846 73.025,26.289 73.025,19.431 72.009,18.415 64.864,18.415 v1(64.862,18.417) ; v1(64.897,16.383) 64.66,16.146 64.66,6.714 65.643,5.731 87.392,5.731 88.9,7.239 88.9,16.256 90.499,17.855 100.221,17.855 U34.5@101.29,18.923
PL10: U2.H21 U34.4 | length 120.3
  Top w0.102: v1(63.923,18.826) 63.955,18.794 63.955,16.362 v1(63.987,16.33)
  Bottom w0.102: v1(60.303,58.032) 60.399,58.032 60.597,57.834 60.615,57.834 60.796,57.653 64.197,57.653 64.343,57.799 66.157,57.799 67.074,58.715 70.237,58.715 72.267,56.685 72.267,26.539 72.821,25.985 72.821,19.989 71.628,18.796 63.953,18.796 v1(63.923,18.826) ; v1(63.987,16.33) 64.459,15.858 64.459,6.63 65.56,5.529 87.475,5.529 89.102,7.155 89.102,16.172 90.582,17.653 100.02,17.653 U34.4@101.29,16.383
PMU_SCK: R45.1 U2.K20 U4.23 | length 114.5
  Top w0.102: U4.23@26.141,53.559 31.785,53.559 31.94,53.404 31.94,52.769 32,52.709 v1(32.837,52.709)
  Signal w0.102: v1(68.051,48.305) 68.091,48.345 68.091,57.619 v1(68.131,57.658)
  Bottom w0.102: v1(32.837,52.709) 32.262,52.709 31.93,52.377 31.93,49.781 32.494,49.217 34.602,49.217 38.989,44.83 38.989,24.178 38.94,24.129 38.94,23.877 38.989,23.828 38.989,23.749 40.325,22.413 67.123,22.413 68.051,23.342 v1(68.051,48.305) ; v1(59.69,56.772) 59.696,56.772 60.052,57.128 60.466,57.128 60.546,57.048 64.447,57.048 64.593,57.194 66.182,57.194 66.216,57.16 67.633,57.16 v1(68.131,57.658)
PMU_SDA: R44.1 U2.K23 U4.24 | length 116.7
  Top w0.102: U4.24@26.141,53.959 31.951,53.959 32.16,53.75 32.743,53.75 v1(32.792,53.799) R44.1@32.841,53.848 ; U2.K23@61.603,56.732 61.81,56.938 63.002,56.938 63.198,56.743 68.716,56.743 68.96,56.987 70.521,56.987 v1(70.547,57.013)
  Signal w0.102: v1(68.545,49.497) 68.545,54.448 70.547,56.45 v1(70.547,57.013)
  Bottom w0.102: v1(32.792,53.799) 32.082,53.799 31.645,53.362 31.645,49.648 32.277,49.016 34.285,49.016 38.663,44.638 38.663,23.614 40.065,22.211 67.395,22.211 68.545,23.362 v1(68.545,49.497) ; v1@70.547,56.946 v1(70.547,57.013)
PS: C52.2 C53.2 C54.2 C55.2 C58.2 C62.2 C64.2 C68.2 C70.2 C71.2 C77.2 C90.2 C91.2 D4.2 D5.1 R54.2 R58.2 R59.2 R61.2 R62.2 R64.2 U4.3 U4.6 U4.13 U4.18 U4.30 U4.33 U4.34 U4.45 U4.46 U4.52 U4.53 U12.1 U13.5 U26.5 U29.5 U30.4 USBC1.A4 USBC1.A9 USBC1.B4 USBC1.B9 | length 361.9
  Top w0.254: USBC1.B4@12.434,70.858 12.759,70.858 12.882,70.735 13.003,70.735 13.107,70.631 13.711,70.631 USBC1.A9@13.734,70.608 ; USBC1.B9@12.434,73.358 12.759,73.358 12.882,73.235 13.003,73.235 13.107,73.131 13.711,73.131 USBC1.A4@13.734,73.108 USBC1.A4@13.757,73.131 ; U4.53@19.295,51.59 19.234,51.59 19.209,51.615 18.917,51.615 v1(18.879,51.654) 18.879,51.709 18.829,51.758 18.946,51.758 19.147,51.959 19.351,51.959 19.358,51.952 19.358,51.592 U4.53@19.325,51.559 ; U4.45@19.325,54.759 19.298,54.732 19.103,54.732 19.057,54.686 19.057,54.617 19.018,54.578 19.022,54.575 19.022,54.432 19.068,54.386 19.298,54.386 U4.46@19.325,54.359 19.447,54.359 19.474,54.386 19.474,54.57 v1@19.477,54.573 ; v1(20.588,48.446) 20.627,48.485 20.627,48.546 20.852,48.771 v1(20.852,48.826) ; v1@20.899,48.826 20.916,48.843 20.916,49.534 U4.3@20.933,49.551 ; v1(21.814,48.635) 21.814,48.668 22.102,48.956 22.106,48.956 22.106,49.524 U4.6@22.133,49.551 ; U4.34@23.36,56.572 23.469,56.681 v1@23.529,56.681 ; v1(23.538,56.789) 23.533,56.783 23.546,56.77 23.546,56.293 v1(23.554,56.285) 23.593,56.324 23.706,56.324 23.733,56.351 U4.33@23.733,56.367 ; U4.13@24.933,49.551 24.96,49.524 24.96,49.066 v1(25.485,48.541) ; U4.30@24.933,56.367 24.96,56.394 24.96,56.775 25.055,56.871 v1(25.055,56.926) ; U4.18@26.141,51.559 26.152,51.548 26.759,51.548 v1(26.77,51.536)
  Top w0.381: R58.2@37.442,82.423 R58.2@37.454,82.423 ; v1(38.862,82.423) R58.2@37.454,82.423 ; R54.2@39.624,80.316 39.624,80.329 39.544,80.408 39.005,80.408 38.453,80.96 U13.5@38.111,80.96 38.111,81.767 R58.2@37.454,82.423
  Top w0.508: C91.2@41.482,17.653 41.482,19.034 41.498,19.05 C90.2@41.514,19.05 ; R59.2@49.322,76.376 49.335,76.376 49.84,76.881 49.84,77.72 U26.5@49.849,77.729 50.615,77.729 51.181,78.294 R61.2@51.181,78.307 52.399,78.307 v1(52.451,78.359) ; R62.2@63.506,76.284 63.519,76.284 64.06,76.825 64.06,77.704 U29.5@64.069,77.713 64.069,77.788 64.078,77.797 64.904,77.797 65.526,78.419 65.539,78.419 65.555,78.435 R64.2@65.555,78.448 65.555,78.461 65.571,78.477 65.996,78.477 66.294,78.774 v1(66.294,80.645) ; v1(86.614,82.169) 86.635,82.19 D4.2@86.635,84.004
  PWR w1.016: v1(15.621,68.453) 15.621,71.374 16.129,71.882 16.129,92.456 19.05,95.377 31.75,95.377 32.639,94.488 45.339,94.488 ; v1(38.862,82.423) 39.116,82.677 45.339,82.677 ; v1(41.641,17.653) 41.449,17.461 v1(41.449,13.867) 41.449,4.779 43.942,2.286 93.98,2.286 98.858,7.164 103.049,7.164 U12.1@104.648,8.763 106.306,10.421 106.306,24.504 100.584,30.226 100.584,42.418 105.41,47.244 105.41,79.629 102.87,82.169 v1@86.728,82.169 ; v1(52.451,78.359) 47.244,78.359 45.339,80.264 45.339,82.677 ; v1(66.294,80.645) 65.659,81.28 65.659,93.472 67.056,94.869 ; v1(86.614,82.169) v1@86.728,82.169 ; 45.339,82.677 45.339,94.488 ; 45.339,94.488 47.244,96.393 65.532,96.393 67.056,94.869 ; 67.056,94.869 87.122,94.869 88.392,93.599 88.392,83.833 v1@86.728,82.169
  other v1: 25.045,48.901 22.106,48.993 19.358,51.672 18.857,54.557 19.316,54.552 16.256,68.453 16.256,69.215 16.256,69.85
PWM0: U2.U2 U33.3 | length 95.4
  Top w0.127: U2.U2@47.953,52.182 46.533,52.182 46.531,52.18 44.141,52.18 40.386,48.425 40.386,23.802 42.656,21.532 65.188,21.532 69.73,16.991 92.993,16.991 v1(93.642,16.342)
  Bottom w0.127: v1(93.642,16.342) 95.417,16.342 U33.3@97.916,13.843
PWR_LED: R90.1 U2.K21 | length 79.4
  Top w0.102: v1(70.352,21.357) 70.352,36.062 70.993,36.703 88.012,36.703 88.265,36.45 88.265,35.837 R90.1@88.227,35.799
  Bottom w0.102: v1(60.308,56.748) 60.348,56.788 61.013,56.788 61.071,56.846 64.531,56.846 64.677,56.992 66.099,56.992 66.133,56.959 68.202,56.959 68.332,56.828 69.362,56.828 69.581,56.609 69.844,56.609 70.924,55.529 70.924,21.93 v1(70.352,21.357)
PWR_ON: R86.2 U4.27 | length 136.3
  Top w0.127: U4.27@26.141,55.159 26.965,55.159 27.128,55.322 30.412,55.322 30.92,55.83 v1(30.92,60.474) ; v1(84.328,30.734) 86.122,30.734 R86.2@86.134,30.745
  Bottom w0.127: v1(30.92,60.474) 30.915,60.479 30.915,72.08 31.811,72.977 43.767,72.977 44.704,73.914 56.003,73.914 56.23,74.141 58.105,74.141 58.332,73.914 69.861,73.914 70.007,74.061 70.043,74.061 70.246,74.264 88.985,74.264 89.389,73.86 89.389,62.411 88.579,61.601 81.392,61.601 80.596,60.805 80.596,32.815 82.677,30.734 v1(84.328,30.734)
REVOVERY: C157.2 R89.1 SW4.2 U2.J22 U35.2 | length 76.8
  Top w0.102: U2.J22@60.953,57.382 63.129,57.382 63.365,57.146 66.575,57.146 66.687,57.258 66.687,57.337 66.994,57.645 v1(66.994,57.741) ; v1(72.347,25.016) 73.176,24.186 95.625,24.186 96.395,24.956 SW4.2@96.395,26.565 96.395,28.7 95.885,29.21 C157.2@94.996,29.21 R89.1@94.996,31.75
  Bottom w0.102: v1(66.994,57.741) 67.565,58.312 69.046,58.312 69.767,57.59 70.302,57.59 70.306,57.594 71.073,57.594 72.047,56.62 72.047,25.315 v1(72.347,25.016)
RTC_VIO: C104.2 C105.2 C106.2 U2.F19 U2.K18 | length 26.9
  Top w0.305: U2.K18@58.353,56.732 58.505,56.884 58.505,57.355 v1(58.534,57.384) ; U2.F19@59.003,59.332 59.104,59.231 59.104,58.912 v1(59.133,58.883)
  PWR w0.305: v1(58.534,57.384) 59.133,57.983 v1(59.133,58.883) ; v1@58.605,57.384 61.448,57.384 63.018,58.954 v1(76.068,58.954)
  Bottom w0.305: C106.2@75.492,55.403 75.492,55.528 75.374,55.646 75.179,55.646 75,55.824 C104.2@75,56.758 75.026,56.784 76.067,56.784 76.247,56.964 76.656,56.964 76.835,57.142 76.835,58.187 76.652,58.37 76.652,58.378 76.504,58.526 76.496,58.526 v1(76.068,58.954)
S_UART_RX: U2.J20 U34.2 | length 120.2
  Top w0.102: v1(59.095,56.754) 59.095,56.789 59.653,57.347 U2.J20@59.653,57.382 ; v1(62.357,16.637) 62.357,16.733 62.48,16.856 v1(62.48,19.027)
  Bottom w0.102: v1(59.095,56.754) 59.163,56.822 59.163,57.131 59.361,57.329 60.549,57.329 60.629,57.249 64.364,57.249 64.51,57.396 66.266,57.396 66.3,57.362 67.216,57.362 67.965,58.11 68.962,58.11 69.684,57.389 70.386,57.389 70.39,57.393 70.977,57.393 71.622,56.747 71.622,56.169 71.755,56.036 71.755,19.864 71.096,19.205 63.766,19.205 63.588,19.027 v1(62.48,19.027) ; v1(62.357,16.637) 62.357,16.383 62.23,16.256 62.23,5.842 63.373,4.699 99.06,4.699 99.314,4.953 99.314,10.654 99.963,11.303 U34.2@101.29,11.303
S_UART_TX: U2.K22 U34.1 | length 114.4
  Top w0.102: U2.K22@60.953,56.732 61.244,56.441 61.723,56.441 61.751,56.469 61.899,56.469 61.971,56.542 68.8,56.542 69.044,56.786 69.405,56.786 69.569,56.621 71.099,56.621 v1(71.156,56.677) ; v1(61.722,16.637) 61.745,16.66 61.745,19.205 v1(61.769,19.229)
  Bottom w0.102: v1(61.722,16.637) 61.722,16.562 62.028,16.256 62.028,5.758 63.289,4.497 99.144,4.497 99.516,4.869 99.516,8.156 100.07,8.711 101.238,8.711 U34.1@101.29,8.763 ; v1(61.769,19.229) 61.837,19.297 62.143,19.297 62.253,19.407 70.842,19.407 71.433,19.998 71.433,55.773 71.162,56.044 71.162,56.671 v1(71.156,56.677)